# Altium PCB Mother_Board.PcbDoc (part 1 of 2)
Units mil, origin at the board's own origin, x right, y up, seen from the top; angles counter-clockwise.
Board outline 4940 x 2025 mil, 2 copper layers (Top Layer, Bottom Layer), stack 71.6 mil thick; 136 components, 138 nets, 424 pads, 117 vias.
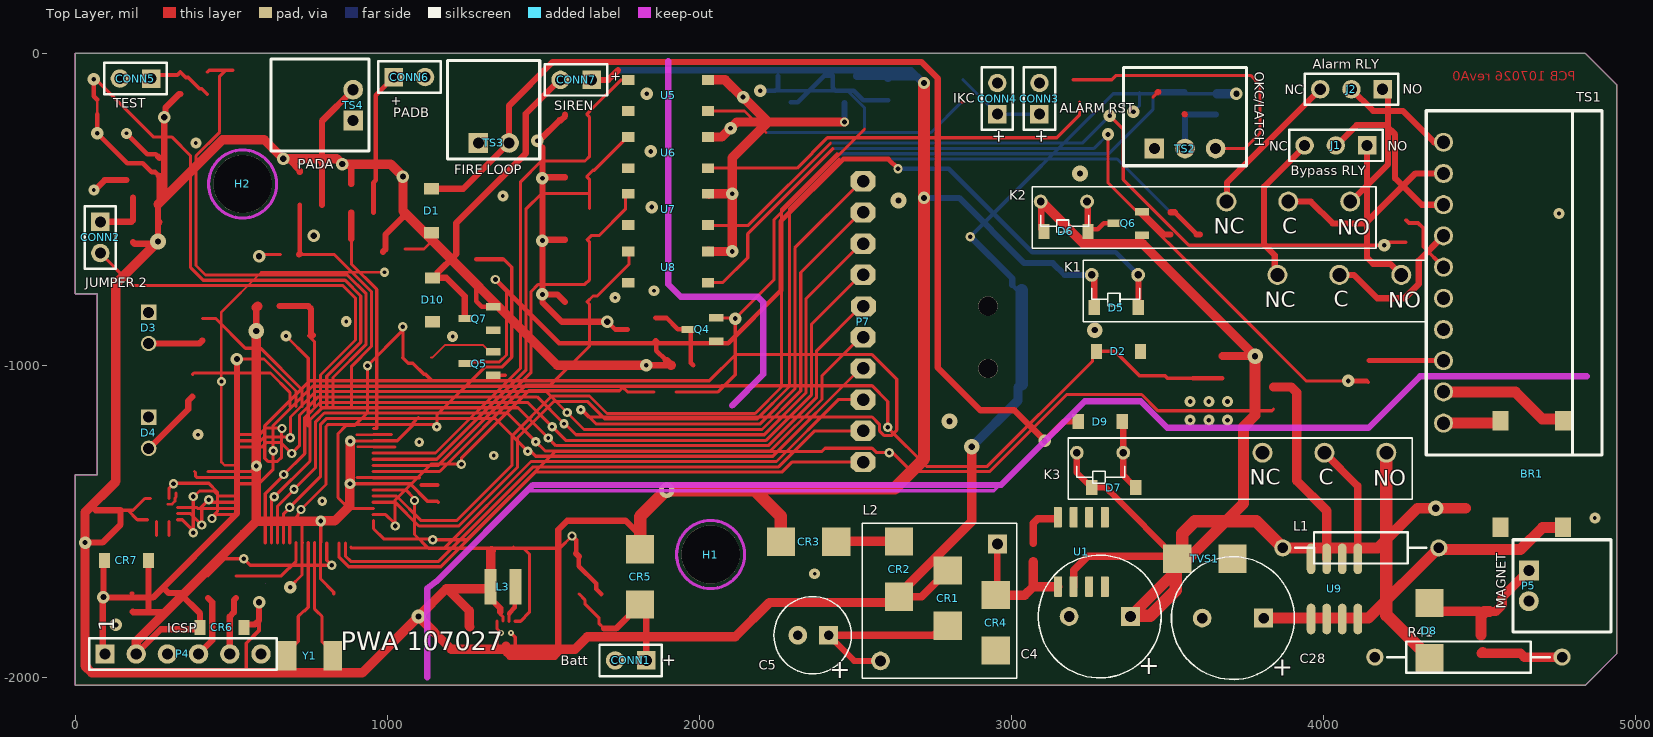
[diagram p0: Top Layer view]
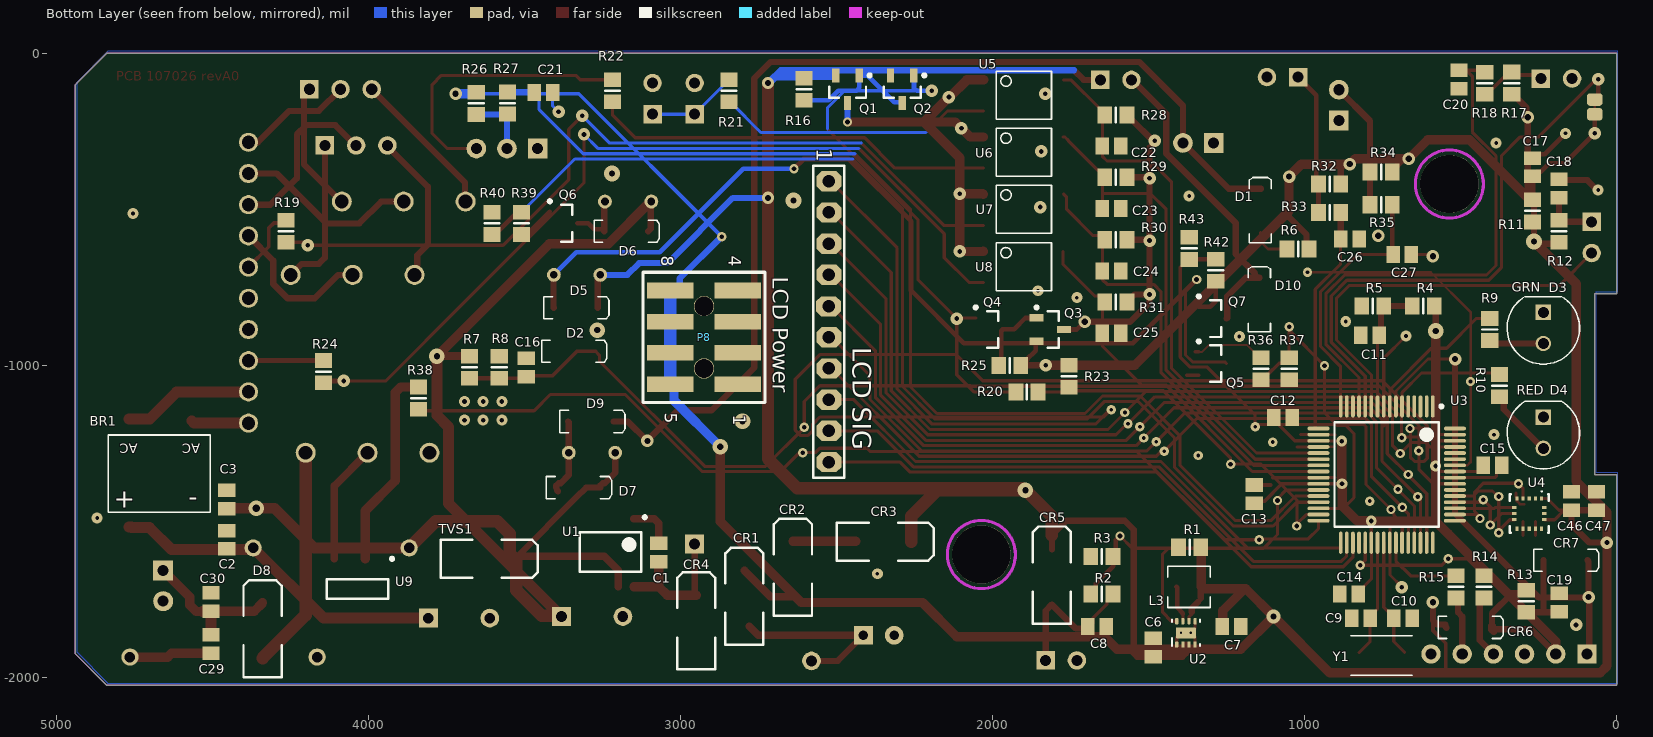
[diagram p1: Bottom Layer view, seen from below]

## Layer stack, top to bottom
Top Solder: solder mask 1, SM-001, Dk 4
Top Layer: signal copper 3.5
Dielectric 2: prepreg 2.8, PP-006, Dk 4.1
Dielectric 1: core 59, Core-043, Dk 4.3
Bottom Layer: signal copper 3.5
Dielectric 3: prepreg 2.8, PP-006, Dk 4.1
Bottom Solder: solder mask 1, SM-001, Dk 4

## Board outline
0,-2025 0,-1350 70,-1350 70,-770 0,-770 0,0 4840,0 4940,-100 4940,-1925 4840,-2025

## Design rules (kind name [scope] priority, off if disabled: settings)
AssemblyTestPointUsage [All] p1 off:
AssemblyTestpoint [All] p1 off: testpointundercomponent=TRUE minsize=40 maxsize=100 preferedsize=60 minholesize=0 maxholesize=40 preferedholesize=32 testpointgrid=1 usegrid=TRUE gridtolerance=0.01 allowsidetop=TRUE allowsidebottom=TRUE
BoardOutlineClearance [All] p1: gap=15 ignorepadtopadclearanceinfootprint=FALSE
Clearance [OnBottom vs OnBottom] p1: gap=7 ignorepadtopadclearanceinfootprint=FALSE
Clearance Clearance_1 [OnTop vs OnTop] p2: gap=7 ignorepadtopadclearanceinfootprint=FALSE
Clearance Clearance_2 [All] p3 off: gap=7 ignorepadtopadclearanceinfootprint=FALSE
Clearance Clearance_3 [All] p4: gap=7 ignorepadtopadclearanceinfootprint=FALSE
ComponentClearance [All] p1 off: gap=10 collisioncheckmode=3 verticalgap=10 showdistances=FALSE
DiffPairsRouting [All] p1 off: maxlimit=10 minlimit=10 mostfreqgap=10 toplayer_minwidth=15 toplayer_maxwidth=15 toplayer_prefwidth=15 bottomlayer_minwidth=15 bottomlayer_maxwidth=15 bottomlayer_prefwidth=15 maxuncoupledlength=500
FabricationTestPointUsage [All] p1 off: valid=0 allowmultiple=FALSE
FabricationTestpoint [All] p1 off: side=3 testpointundercomponent=TRUE minsize=40 maxsize=100 preferedsize=60 minholesize=0 maxholesize=40 preferedholesize=32 testpointgrid=1 allowsidetop=TRUE allowsidebottom=TRUE usegrid=TRUE gridtolerance=0.01
FanoutControl Fanout_Default [All] p1: bgadir=Out bgaviamode=Centered fanoutstyle=Auto fanoutdirection=Alternating viagrid=1 // Fanout_Default (Default Rule)
FanoutControl Fanout_Small [(CompPinCount < 5)] p2: bgadir=Out bgaviamode=Centered fanoutstyle=Auto fanoutdirection=OutThenIn viagrid=1 // Fanout_Small (Default Rule)
FanoutControl Fanout_LCC [IsLCC] p4: bgadir=Out bgaviamode=Centered fanoutstyle=Auto fanoutdirection=Alternating viagrid=1 // Fanout_LCC (Default Rule)
FanoutControl Fanout_BGA [IsBGA] p5: bgadir=Out bgaviamode=Centered fanoutstyle=Auto fanoutdirection=Alternating viagrid=1 // Fanout_BGA (Default Rule)
Height [All] p1 off: minheight=0 maxheight=2000 prefheight=500
HoleSize [All] p1: absolutevalues=TRUE maxlimit=200 minlimit=10 maxpercent=80.000 minpercent=20.000
HoleToHoleClearance [All] p1: gap=5 allowstackedmicrovias=TRUE
LayerPairs [All] p1: enforce=FALSE
MinimumAnnularRing [All] p1: minimumring=6
MinimumSolderMaskSliver [All] p1: minsoldermaskwidth=1
NetsToIgnore [InNet('GND')] p1:
PlaneConnect [All] p1: planeconnectstyle=Relief reliefexpansion=20 reliefentries=4 reliefconductorwidth=8 reliefairgap=12
PolygonConnect [All] p1: thpad.connectstyle=Relief thpad.reliefconductorwidth=15 thpad.reliefentries=4 thpad.polygonreliefangle="45 Angle" thpad.airgapwidth=12 smdpad.connectstyle=Relief smdpad.reliefconductorwidth=15 smdpad.reliefentries=4 smdpad.polygonreliefangle="45 Angle" smdpad.airgapwidth=12 via.connectstyle=Direct via.reliefconductorwidth=20 via.reliefentries=4 via.polygonreliefangle="45 Angle" via.airgapwidth=10
RoutingVias [All] p1: holewidth=10 width=20 viastyle="Through Hole" minholewidth=5 minwidth=10 maxholewidth=20 maxwidth=50
ShortCircuit [All] p1 off: allowed=FALSE
SilkToSilkClearance [All] p1 off: silktosilkclearance=1
SilkToSolderMaskClearance [IsPad] p1 off: minsilkscreentomaskgap=1 clearancetoexposedcopper=TRUE
SolderMaskExpansion [All] p1: expansion=4 istentingtop=FALSE
UnRoutedNet [All] p1: checkbadconnections=TRUE
Width [All] p1: maxlimit=100 minlimit=6 preferedwidth=12
10 further rules are at their usual default settings.

## Classes and differential pairs
component class U_MotherBoard: H1 H2 J1 J2 TS1 TS2 TS3 TS4
component class U_Group4_Inputs: 27002 C20 C21 C22 C23 C24 C25 C26 C27 CONN3 CONN4 CONN5 CONN6 Q2 Q3 Q4 R16 R18 R19 R20 R21 R22 R23 R24 R25 R26 R27 R28 R29 R30 R31 R32 R33 R34 R35 U5 U6 U7 U8
component class U_microcontroller: C9 C10 C11 C12 C13 C14 C15 C16 D1 D2 D3 D4 R4 R5 R6 R7 R8 R9 R10 Y1
component class U_Offboard_Outputs: C28 C29 C30 CONN7 D5 D6 D7 D8 D9 D10 K1 K2 K3 P5 Q5 Q6 Q7 R36 R37 R38 R39 R40 R41 R42 R43 U9
component class U_Power: BR1 C1 C2 C3 C4 C5 C6 C7 C8 CONN1 CR1 CR2 CR3 CR4 CR5 L1 L2 L3 R1 R2 R3 TVS1 U1 U2
component class U_Program_Selection: C17 C18 C19 C46 C47 CONN2 CR6 CR7 P4 R11 R12 R13 R14 R15 U4

## Components (designator, comment, footprint, x,y, rotation, side; value= is the part's Value field where it differs from the comment)
BR1 "DF02S" DF02S 4667.44,-1348 r0 top
C1 "Cap" C0805 3070,-1600 r90 bottom locked value=10pF
C2 "Cap" C0805 4455,-1558.98 r90 bottom value=0.01uF
C3 "Cap" C0805 4455,-1430 r90 bottom locked value=0.01uF
C4 "Cap Pol3" "10X12.5 CAP" 3283.43,-1805 r180 top locked value=220uF
C5 "Cap Pol3" "6.3X15 CAP" 2365,-1865 r180 top locked value=82uF
C6 "Cap" C0805 1485,-1904.94 r90 bottom value=10uF
C7 "Cap" C0805 1235,-1837.4 r180 bottom locked value=22nF
C8 "Cap" C0805 1665,-1837.4 r180 bottom locked value=0.1uF
C9 "Cap" C0805 820,-1810.43 r180 bottom locked value=22pF
C10 "Cap" C0805 685,-1810.43 r180 bottom locked value=22pF
C11 "Cap" C0805 790.2,-903.71 r180 bottom locked value=0.1uF
C12 "Cap" C0805 1070,-1167 r180 bottom locked value=0.1uF
C13 "Cap" C0805 1161.69,-1412.99 r90 bottom value=0.1uF
C14 "Cap" C0805 857.76,-1732.87 r180 bottom value=0.1uF
C15 "Cap" C0805 397.43,-1320.29 r180 bottom value=0.1uF
C16 "Cap" C0805 3495.12,-1006.58 r90 bottom value=0.1uF
C17 "Cap" C0805 270,-365 r90 bottom locked value=0.1uF
C18 "Cap" C0805 185,-433.31 r90 bottom value=0.1uF
C19 "Cap" C0805 183.79,-1759.89 r90 bottom value=0.1uF
C20 "Cap" C0805 505.36,-83.88 r270 bottom value=0.1uF
C21 "Cap" C0805 3440,-125 r180 bottom value=0.1uF
C22 "Cap" C0805 1618.78,-297.14 r180 bottom locked value=0.1uF
C23 "Cap" C0805 1618.78,-497.14 r180 bottom locked value=0.1uF
C24 "Cap" C0805 1618.78,-697.14 r180 bottom value=0.1uF
C25 "Cap" C0805 1618.78,-897.14 r180 bottom locked value=0.1uF
C26 "Cap" C0805 855,-595.2 r180 bottom locked value=0.1uF
C27 "Cap" C0805 687.2,-645 r180 bottom locked value=0.1uF
C28 "Cap Pol3" "10X12.5 CAP" 3710,-1810 r180 top locked value=100uF
C29 "Cap" C0805 4505.31,-1893.31 r270 bottom value=200uF
C30 "Cap" C0805 4505.31,-1758.72 r90 bottom value=0.01uF
C46 "Cap" C0805 145,-1435 r90 bottom locked value=10uF
C47 "Cap" C0805 65,-1435 r90 bottom locked value=100nF
CONN1 "Batt" BAT-2 1780,-1945.79 r180 top locked
CONN2 "JUMPER 2" HDR1X2 80,-540 r270 top locked
CONN3 "ALARM RST" BAT-2 3090,-145 r90 top locked
CONN4 "IKC" BAT-2 2955,-145 r90 top locked
CONN5 "TEST" HDR1X2 242.59,-80.73 r180 top
CONN6 "PADB" BAT-2 1070.83,-76.01 r0 top
CONN7 "SIREN" BAT-2 1605,-85 r180 top
CR1 "Diode" SMB 2795.79,-1746.3 r90 top locked
CR2 "Diode" SMB 2640,-1652.87 r90 top locked
CR3 "Diode" SMB 2350,-1565 r180 top locked
CR4 "D Schottky" SMB 2950,-1825 r90 top locked
CR5 "Diode" SMB 1810,-1677.87 r90 top locked
CR6 "Diode" SOD-123 470,-1840 r180 top locked
CR7 "Diode" SOD-123 163.9,-1624.88 r180 top
D1 "Diode" SOD-123 1141.9,-504.57 r90 top locked
D2 "D Zener" SOD-123 3343.22,-955.04 r180 top
D3 "GREEN" "T-1 3/4" 235,-880 r90 top locked
D4 "RED" "T-1 3/4" 235,-1216 r90 top locked
D5 "Diode" SOD-123 3336.36,-815 r180 top
D6 "Diode" SOD-123 3175,-570.43 r180 top locked
D7 "Diode" SOD-123 3328.19,-1391.57 r180 top locked
D8 "Diode" SMB 4340,-1850 r90 top locked
D9 "Diode" SOD-123 3285,-1180 r180 top locked
D10 "Diode" SOD-123 1144.84,-790 r90 top locked
H1 "Siren Mounting Hole" "SIREN MOUNT HOLE"#1 2036,-1687.5 r0 top locked
H2 "Siren Mounting Hole" "SIREN MOUNT HOLE"#2 5335,-1860 r0 top locked
J1 "Bypass RLY" "3 PIN HEADER FOR RELAY" 4040,-295 r0 top locked
J2 "Alarm RLY" "3 PIN HEADER FOR RELAY" 4090,-115 r0 top locked
K1 "Relay-SPDT" FTR-LY 3753.62,-710 r0 top locked
K2 "Relay-SPDT" FTR-LY 3590,-475 r0 top locked
K3 "Relay-SPDT" FTR-LY 3705.79,-1280 r0 top locked
L1 "Inductor" AXIAL-0.5 4120,-1585 r180 top locked value=100uH
L2 "Inductor" PE-53819NL 2768,-1760 r0 top locked value=173uH
L3 "Inductor" VLF3012S 1370.63,-1710 r0 top value=2.2uH
P4 "ICSP" HDR1X6 95,-1925 r0 top locked
P5 "MAGNET" 7025#1 4658.55,-1706.65 r270 top
P7 "LCD SIG" "10 PIN HEADER" 2525,-860 r180 top locked
P8 "LCD Power" "MOLEX 15453508" 2925,-910 r270 bottom
Q1 "MOSFET-P" SOT-23_N#1 2465,-115 r270 bottom
Q2 "2N7002" SOT-23_N#1 2290,-115 r270 bottom locked
Q3 "MOSFET-P" SOT-23_N#1 1815,-885 r180 bottom
Q4 "MOSFET-N" SOT-23_N#2 2010,-885 r180 top locked
Q5 "MOSFET-N" SOT-23_N#2 1295,-994.13 r180 top
Q6 "MOSFET-N" SOT-23_N#2 3375,-545 r180 top locked
Q7 "2N7002" SOT-23_N#2 1295,-850 r180 top locked
R1 "Res3" 6-0805_N 1368.66,-1582.72 r180 bottom value=100K
R2 "Res3" 6-0805_N 1650,-1732.87 r180 bottom value=200K
R3 "Res3" 6-0805_N 1650,-1612.87 r180 bottom value=110K
R4 "Res3" 6-0805_N 620,-810 r180 bottom value=100K
R5 "Res3" 6-0805_N 781.78,-810 r180 bottom value=330K
R6 "Res3" 6-0805_N 1021.17,-627 r180 bottom value=100K
R7 "Res3" 6-0805_N 3676.3,-1005.9 r90 bottom value=240K
R8 "Res3" 6-0805_N 3581.57,-1005.9 r270 bottom value=43K
R9 "Res3" 6-0805_N 407,-885 r90 bottom value=68R
R10 "Res3" 6-0805_N 375,-1065 r90 bottom value=68R
R11 "Res3" 6-0805_N 270,-505 r90 bottom value=100K
R12 "Res3" 6-0805_N 185,-570 r90 bottom value=100K
R13 "Res3" 6-0805_N 290,-1756.09 r90 bottom value=10K
R14 "Res3" 6-0805_N 425,-1710 r90 bottom value=100R
R15 "Res3" 6-0805_N 515,-1710 r90 bottom value=100R
R16 "Res3" 6-0805_N 2605,-115 r90 bottom value=10K
R17 "Res3" 6-0805_N 336.13,-95.22 r270 bottom value=10K
R18 "Res3" 6-0805_N 422.86,-95.69 r90 bottom value=100K
R19 "Res3" 6-0805_N 4265,-570 r90 bottom value=2.2K
R20 "Res3" 6-0805_N 1890,-1085 r180 bottom value=100
R21 "Res3" 6-0805_N 2845,-120 r90 bottom value=2.2K
R22 "Res3" 6-0805_N 3218,-120 r90 bottom value=2.2K
R23 "Res3" 6-0805_N 1755,-1035 r90 bottom value=100k
R24 "Res3" 6-0805_N 4145,-1020 r90 bottom value=2.2K
R25 "Res3" 6-0805_N 1945,-1000 r180 bottom value=10K
R26 "Res3" 6-0805_N 3655,-160.43 r90 bottom value=10K
R27 "Res3" 6-0805_N 3555,-159.29 r90 bottom value=100K
R28 "Res3" 6-0805_N 1605,-197.14 r180 bottom value=10K
R29 "Res3" 6-0805_N 1605,-397.14 r180 bottom value=10K
R30 "Res3" 6-0805_N 1605,-597.14 r180 bottom value=10K
R31 "Res3" 6-0805_N 1605,-797.14 r180 bottom value=10K
R32 "Res3" 6-0805_N 920,-418.33 r180 bottom value=10K
R33 "Res3" 6-0805_N 920,-510 r180 bottom value=100K
R34 "Res3" 6-0805_N 755,-380 r180 bottom value=10K
R35 "Res3" 6-0805_N 755,-485 r180 bottom value=100K
R36 "Res3" 6-0805_N 1140,-1010.79 r270 bottom value=100
R37 "Res3" 6-0805_N 1049.53,-1010.79 r270 bottom value=100k
R38 "Res3" 6-0805_N 3840,-1105 r90 bottom value=100k
R39 "Res3" 6-0805_N 3510.04,-545 r90 bottom value=100
R40 "Res3" 6-0805_N 3605,-545 r90 bottom value=100k
R41 "Res3" AXIAL-0.6 4465,-1935 r0 top locked value=10R
R42 "Res3" 6-0805_N 1285,-695 r90 bottom value=100
R43 "Res3" 6-0805_N 1370,-625 r90 bottom value=100k
TS1 "Molex 70553-0044" "10 Pin Molex Horizontal" 4385,-1185 r270 top locked
TS2 "OKC/LATCH" 7035 3556.57,-305 r0 top locked
TS3 "FIRE LOOP" 7025#2 1340.79,-287.09 r0 top
TS4 "PADA" 7025#2 890.54,-165.85 r90 top
TVS1 "D Zener" SMB 3620,-1620 r180 top locked
U1 "LM2674M-12" D0008A_M 3224.4,-1598 r270 top locked
U2 "TPS62172DSGT" DSG0008A_V 1380,-1860 r0 top locked
U3 "PIC18F67J10T-I/PT" PIC18F67J10T-I/PT 737,-1350 r0 top locked
U4 "LIS3DHTR" LIS3DHTR 280,-1475 r0 top locked
U5 "Optoisolator1" VOM618A-3T 1900,-135 r180 top locked
U6 "Optoisolator1" VOM618A-3T 1900,-318 r180 top locked
U7 "Optoisolator1" VOM618A-3T 1900,-500 r180 top locked
U8 "Optoisolator1" VOM618A-3T 1900,-685 r180 top locked
U9 "AUIPS7091GTR" SO8_M 4035.45,-1716.5 r270 top locked
Y1 "8MHz" ABM3 752,-1930 r180 top locked

## Footprints (in the part's own frame and the unit in brackets; to place one, negate y for a bottom-side part, rotate by r counter-clockwise, add the part's x,y. Pads: shape width x height; smd on the part's side, far side on the other; paste and mask are expansions set on the pad)
"3 PIN HEADER FOR RELAY" [mm]
  rect 1.5x1.5 hole 0.9: 1(2.54,0)
  round 1.5 hole 0.9: 2(0,0) 3(-2.54,0)
  silkscreen extent -3.81,-1.27 3.81,1.27, body extent -3.78,-1.29 3.84,1.25, height 8.72
6-0805_N [mm] "Chip Resistor, Body 2.0x1.2mm, IPC Medium Density"
  rect 1.2x1.4 smd: 1(-0.9,0) 2(0.9,0)
  silkscreen extent 0,-0.6 0,0.6, body extent -1.07,-0.7 1.07,0.7, height 0.7
"6.3X15 CAP" [mil] "6.3x15 Cap"
  rect 60x60 hole 30: 1(-49.21,0)
  round 60 hole 30: 2(49.21,0)
  silkscreen extent -122,-124 126,124, body extent -122,-124 126,124, height 591
"10 PIN HEADER" [mil] "10 pin header, vertical"
  oct 80x65 hole 40: 1(0,-450) 2(0,-350) 3(0,-250) 4(0,-150) 5(-1,-49) 6(0,50) 7(0,150) 8(0,250) 9(0,350) 10(0,450)
  body extent -50,-502 49,507, height 124
"10 Pin Molex Horizontal" [mm] "Horizontal Molex SL 10 Pin Connector"
  round 1.55 hole 1.09: 1(0,0) 2(-2.54,0) 3(-5.08,0) 4(-7.62,0) 5(-10.16,0) 6(-12.7,0) 7(-15.24,0) 8(-17.78,0) 9(-20.32,0) 10(-22.86,0)
  silkscreen extent -25.43,-1.4 2.6,12.9, body extent -25.47,-0.7 2.47,12.89, height 7.06
"10X12.5 CAP" [mil] "10x12.5 CAP"
  rect 60x60 hole 34: 1(-98.43,0)
  round 60 hole 34: 2(98.43,0)
  silkscreen extent -197,-197 197,197, body extent -197,-197 197,197, height 492
7025#1 [mil] "MOLEX SPOX 2-terminal right angle through hole header"
  rect 64x64 hole 35.43: 1(-49.21,0)
  round 64 hole 35.43: 2(49.21,0)
  silkscreen extent -148,-51 148,264, body extent -146,-49 146,262, height 195
7025#2 [mil] "MOLEX SPOX 2-terminal right angle through hole header"
  rect 62.99x62.99 hole 35.43: 1(-49.21,0)
  round 62.99 hole 35.43: 2(49.21,0)
  silkscreen extent -148,-51 148,264, body extent -146,-49 146,262, height 195
7035 [mm] "MOLEX SPOX 3-terminal right angle through hole header"
  rect 1.6x1.6 hole 0.9: 1(-2.5,0)
  round 1.6 hole 0.9: 2(0,0) 3(2.5,0)
  silkscreen extent -5,-1.4 5,6.6, body extent -4.95,-1.35 4.95,6.55, height 4.95
ABM3 [mm] "8MHz Crystal SMD"
  rect 1.5x2.4 smd: 1(-1.85,0) 2(1.85,0)
AXIAL-0.5 [mm] "Axial Device, Thru-Hole; 2 Leads; 0.5 in Pin Spacing"
  round 1.4 hole 0.85: 1(-6.35,0) 2(6.35,0)
  silkscreen extent -5.33,-1.27 5.33,1.27
AXIAL-0.6 [mm] "Axial Device, Thru-Hole; 2 Leads; 0.6 in Pin Spacing"
  round 1.4 hole 0.85: 1(-7.62,0) 2(7.62,0)
  silkscreen extent -6.6,-1.27 6.6,1.27
BAT-2 [mm] "Battery; 2 Leads"
  rect 1.5x1.5 hole 0.9: 1(-1.27,0)
  round 1.5 hole 0.9: 2(1.27,0)
  silkscreen extent -2.54,-1.27 2.54,1.27
C0805 [mm] "Chip Capacitor, Body 2.0x1.3mm, IPC High Density"
  rect 1.1x1.4 smd: 1(-0.75,0) 2(0.75,0)
  body extent -1.1,-0.72 1.1,0.72, height 1.4
D0008A_M [mm] "SOIC, 8-Leads, Body 5x4mm, Pitch 1.27mm, IPC Low Density"
  rrect15% 1.65x0.65 smd: 1(-2.825,-1.905) 2(-2.825,-0.635) 3(-2.825,0.635) 4(-2.825,1.905) 5(2.825,1.905) 6(2.825,0.635) 7(2.825,-0.635) 8(2.825,-1.905)
  body extent -3,-2.45 3,2.45, height 1.63
DF02S [mm] "Single Phase Bridge Rectifier"
  rect 1.3x1.6 smd: 1(-2.55,4.33) 2(2.55,4.33) 3(2.55,-4.33) 4(-2.55,-4.33)
  body extent -4.11,-3.19 4.31,3.23, height 3.8
DSG0008A_V [mm]
  rrect40% 0.25x0.5 smd far side: 1(0.762,-0.884) 2(0.262,-0.884) 3(-0.238,-0.884) 4(-0.738,-0.884) 5(-0.738,1.016) 6(-0.238,1.016) 7(0.262,1.016) 8(0.762,1.016)
  rrect11% 1.6x0.9 smd far side paste-0.45: 9(0.012,0.066)
  body extent -1.04,-0.98 1.06,1.12, height 0.8
FTR-LY [mm] "SPDT RELAY 6A SLIM TYPE"
  round 1.627 hole 1.127: 1(7.56,0) 2(2.52,0) 3(12.6,0)
  round 1.127 hole 0.627: 4(-12.6,0) 5(-8.82,0)
  silkscreen extent -13.3,-3.8 14.7,1.2, body extent -13.3,-3.8 14.7,1.2, height 14.5
HDR1X2 [mm] "Connector; Header; 2 Position"
  rect 1.5x1.5 hole 0.9: 1(0,0)
  round 1.5 hole 0.9: 2(2.54,0)
  silkscreen extent -1.27,-1.27 3.81,1.27
HDR1X6 [mil] "Connector; Header; 6 Position"
  rect 62x62 hole 36: 1(0,0)
  round 62 hole 36: 2(100,0) 3(200,0) 4(300,0) 5(400,0) 6(500,0)
  silkscreen extent -50,-50 550,50
LIS3DHTR [mm]
  rect 0.25x0.35 smd far side: 1(-1,1.225) 2(-0.5,1.225) 3(0,1.225) 4(0.5,1.225) 5(1,1.225) 9(1,-1.225) 10(0.5,-1.225) 11(0,-1.225) 12(-0.5,-1.225) 13(-1,-1.225)
  rect 0.35x0.25 smd far side: 6(1.225,0.5) 7(1.225,0) 8(1.225,-0.5) 14(-1.225,-0.5) 15(-1.225,0) 16(-1.225,0.5)
  body extent -1.5,-1.5 1.5,1.5, height 1
"MOLEX 15453508" [mil] "2.54mm Pitch C-Grid PCB Connector, Surface Mount, High Profile, Dual Row, Vertical, 8 Circuits"
  round 65 / inner round 65 / far side round 62 hole 62 unplated: 0(-100,0) 0(100,0)
  rect 50x150 smd: 1(150,108) 2(50,108) 3(-50,108) 4(-150,108) 5(150,-108) 6(50,-108) 7(-50,-108) 8(-150,-108)
  silkscreen extent -208,-196 209,195, body extent -199,-139 200,127, height 100
PE-53819NL [mm] "INDUCTOR for 12V Regulator"
  rect 1.52x1.52 hole 0.89: 1(4.76,4.76)
  round 1.52 hole 0.89: 2(-4.76,-4.76)
  silkscreen extent -6.26,-6.16 6.34,6.44, body extent -6.26,-6.16 6.34,6.44, height 9.52
PIC18F67J10T-I/PT [mm]
  oval 0.3x1.8 smd far side: 1(-3.75,5.55) 2(-3.25,5.55) 3(-2.75,5.55) 4(-2.25,5.55) 5(-1.75,5.55) 6(-1.25,5.55) 7(-0.75,5.55) 8(-0.25,5.55) 9(0.25,5.55) 10(0.75,5.55) 11(1.25,5.55) 12(1.75,5.55) 13(2.25,5.55) 14(2.75,5.55) 15(3.25,5.55) 16(3.75,5.55) 33(3.75,-5.55) 34(3.25,-5.55) 35(2.75,-5.55) 36(2.25,-5.55) 37(1.75,-5.55) 38(1.25,-5.55) 39(0.75,-5.55) 40(0.25,-5.55) 41(-0.25,-5.55) 42(-0.75,-5.55) 43(-1.25,-5.55) 44(-1.75,-5.55) 45(-2.25,-5.55) 46(-2.75,-5.55) 47(-3.25,-5.55) 48(-3.75,-5.55)
  oval 1.8x0.3 smd far side: 17(5.55,3.75) 18(5.55,3.25) 19(5.55,2.75) 20(5.55,2.25) 21(5.55,1.75) 22(5.55,1.25) 23(5.55,0.75) 24(5.55,0.25) 25(5.55,-0.25) 26(5.55,-0.75) 27(5.55,-1.25) 28(5.55,-1.75) 29(5.55,-2.25) 30(5.55,-2.75) 31(5.55,-3.25) 32(5.55,-3.75) 49(-5.55,-3.75) 50(-5.55,-3.25) 51(-5.55,-2.75) 52(-5.55,-2.25) 53(-5.55,-1.75) 54(-5.55,-1.25) 55(-5.55,-0.75) 56(-5.55,-0.25) 57(-5.55,0.25) 58(-5.55,0.75) 59(-5.55,1.25) 60(-5.55,1.75) 61(-5.55,2.25) 62(-5.55,2.75) 63(-5.55,3.25) 64(-5.55,3.75)
  body extent -5,-5 5,5, height 1.6
"SIREN MOUNT HOLE"#1 [mil]
  round 187 hole 187 unplated: 0(0,81.2)
"SIREN MOUNT HOLE"#2 [mil]
  round 187 hole 187 unplated: 0(-4799,1441.3)
SMB [mm] "DO-214-AA/SMB; 2 C-Bend Leads; Body 5.3 x 3.6 mm, inc. leads (LxW)"
  rect 2.3x2.3 smd: 1(-2.25,0) 2(2.25,0)
SO8_M [mm] "SOIC, 8-Leads, Body 4.9x3.9mm, Pitch 1.27mm, IPC Low Density"
  oval 2.5x0.7 smd: 1(-2.45,-1.905) 2(-2.45,-0.635) 3(-2.45,0.635) 4(-2.45,1.905) 5(2.45,1.905) 6(2.45,0.635) 7(2.45,-0.635) 8(2.45,-1.905)
  body extent -2,-2.5 2,2.5, height 1.75
SOD-123 [mm] "SOD-123 Diode"
  rect 0.91x1.22 smd: 1(-1.79,0) 2(1.79,0)
  body extent -1.79,-1.9 1.41,0.85, height 2.45
SOT-23_N#1 [mm] "SOT23, 3-Leads, Body 2.9x1.3mm, Pitch 0.95mm, Lead Span 2.5mm, IPC Medium Density"
  rect 1.15x0.6 smd: 1(-1.125,0.95) 2(-1.125,-0.95) 3(1.125,0)
  silkscreen extent -1.25,-1.5 0.7,1.92, body extent -0.7,-1.5 0.7,1.5, height 1.1
SOT-23_N#2 [mm] "SOT23, 3-Leads, Body 2.9x1.3mm, Pitch 0.95mm, Lead Span 2.5mm, IPC Medium Density"
  rect 1.15x0.6 smd: 1(-1.125,-0.95) 2(-1.125,0.95) 3(1.125,0)
  body extent -0.7,-1.5 0.7,1.5, height 1.1
"T-1 3/4" [mil] "T-1 3/4 LED"
  round 49.37 hole 35: 1(-50,0)
  rect 49.37x49.37 hole 35: 2(50,0)
  body extent -101,-98 96,98, height 1039
VLF3012S [mm] "INDUCTOR FOR 3.3V Regulator"
  rect 1x2.9 smd: 1(1.015,0) 2(-1.015,0)
  body extent -1.85,-1.4 1.45,1.7, height 2.45
VOM618A-3T [mm] "Single Opto-Isolator"
  rect 1x0.8 smd: 1(-3.25,-1.27) 2(-3.25,1.27) 3(3.25,1.27) 4(3.25,-1.27)
  body extent -2.25,-1.97 2.25,1.93, height 3.8

## Part data
BR1: "Single Phase Bridge Rectifier", ComponentLink1Description=Datasheet
C1 C2 C3 C6 C7 C8 C9 C10 C11 C12 C13 C14 C15 C16 C17 C18 C19 C20 C21 C22 C23 C24 C25 C26 C27 C29 C30 C46 C47: "Capacitor", PackageReference=RAD-0.3
C4: "Polarized Capacitor (Surface Mount)", PACKAGE="10x12.5 50V radial capacitor", ComponentLink1Description=Datasheet, ComponentLink1URL=http://products.nichicon.co.jp/en/pdf/XJA043/e-uvz.pdf
C5: "Polarized Capacitor (Surface Mount)", PACKAGE="6.3x15 35V radial capacitor", ComponentLink1Description=Datasheet, ComponentLink1URL=http://www.farnell.com/datasheets/1901197.pdf
C28: "Polarized Capacitor (Surface Mount)", MFR=KEMET, MFR P/N=ESK107M050AH1AA, PACKAGE="10x12.5mm Electrolytic Capacitor"
CONN1 CONN2 CONN3 CONN4 CONN5 CONN6 CONN7 P5: library part "Header 2", "Header, 2-Pin", ComponentLink1Description=Datasheet
CR1 CR2 CR3 CR5: "Default Diode", MFR P/N=4004TR, PACKAGE=SMB, ComponentLink1Description=Datasheet
CR4: "Schottky Diode", MFR=VIshay, MFR P/N=SS26, PACKAGE="SMB Schottky Barrier Rectifier", ComponentLink1Description=Datasheet, ComponentLink1URL=http://www.vishay.com/docs/88748/ss22.pdf
CR6 CR7: "Default Diode", MFR P/N=4004TR, ComponentLink1Description=Datasheet
D1 D5 D6 D7 D9: "1N4937", MFR P/N=1N4148W, ComponentLink1Description=Datasheet
D2: "Zener Diode", MFR="ON Semiconductor", MFR P/N=MMSZ5221BT1, PACKAGE=SOD-123, ComponentLink1Description=Datasheet
D3: library part LED2, "Typical RED, GREEN, YELLOW, AMBER GaAs LED", MFR=Kingbright, MFR P/N=W53LCGCK, PACKAGE="T-1 3/4 LED Green Low I", ComponentLink1Description=Datasheet
D4: library part LED2, "Typical RED, GREEN, YELLOW, AMBER GaAs LED", MFR=Kingbright, MFR P/N=W53L8RC, PACKAGE="T-1 3/4 LED Red Low I", ComponentLink1Description=Datasheet
D8: "1N4937", MFR P/N=4004TR, ComponentLink1Description=Datasheet
D10: "1N4937", MFR P/N=1N4148W, PACKAGE=SMB, ComponentLink1Description=Datasheet
J1 J2: library part "Header 3", "Header, 3-Pin"
K1 K2 K3: "Single-Pole Dual-Throw Relay", ComponentLink1Description=Datasheet
L1: MFR=Fastron, MFR P/N=SMCC/N-101J-01, PACKAGE="Leaded Inductor", ComponentLink1Description=Datasheet, ComponentLink1URL=http://www.fastrongroup.com/image-show/72/SMCC.pdf?type=Complete-DataSheet&productType=series
L2: MFR=Pulse, MFR P/N=PE-53819, PACKAGE="Toroid Inductor THT", ComponentLink1Description=Datasheet, ComponentLink1URL=http://products.pulseelex.com/files/product_files/SPM2007_47.pdf
P4: library part "Header 6", "Header, 6-Pin"
P7: library part "Header 10", "Header, 10-Pin"
P8: library part 0015453508, "Header Connector,PCB Mount,PLUG,8 Contacts,SKT,0.1 Pitch"
Q1 Q3: "P-Channel MOSFET", MFR P/N=NDS0605, ComponentLink1Description=Datasheet
Q2 Q7: library part MOSFET-N, "N-Channel MOSFET", ComponentLink1Description=Datasheet, MFR P/N=2N7002
Q4 Q5 Q6: "N-Channel MOSFET", MFR P/N=2N7002, ComponentLink1Description=Datasheet
R1 R2 R3 R4 R5 R6 R7 R8 R9 R10 R11 R12 R13 R14 R15 R16 R17 R18 R19 R20 R21 R22 R23 R24 R25 R26 R27 R28 R29 R30 R31 R32 R33 R34 R35 R36 R37 R38 R39 R40 R41 R42 R43: "Resistor", PACKAGE="0805 SMD 1/8W", ComponentLink1Description=Datasheet
TS1: "Molex SL Horizontal 1 x 10 SL Header"
TS2: library part "Header 3H", "Header, 3-Pin, Right Angle"
TS3 TS4: library part "Header 2H", "Header, 2-Pin, Right Angle"
TVS1: "Zener Diode", MFR=Fairchild, MFR P/N=SMBJ30CA, PACKAGE="SMB Transient Voltage Supressor", ComponentLink1Description=Datasheet, ComponentLink1URL=https://www.fairchildsemi.com/datasheets/SM/SMBJ30CA.pdf
U1: library part CMP-019-00049-1, "IC REG BUCK 12V 0.5A 8-SOIC", ComponentLink1Description="Datasheet URL", ComponentLink1URL=http://www.ti.com/general/docs/lit/getliterature.tsp?genericPartNumber=LM2674&fileType=pdf
U2: library part TI-TPS62172DSG8-1600X900TP, "Buck Step Down Regulator with 3 to 17 V Input and 3.3 V Output, -40 to 85 degC, 8-Pin WSON (DSG), Green (RoHS & no Sb/Br)", MFR=Instruments, MFR P/N=TPS62172, PACKAGE="3.3V Buck Converter", ComponentLink1Description=Datasheet, ComponentLink1URL=http://www.ti.com/general/docs/lit/getliterature.tsp?genericPartNumber=TPS62172&fileType=pdf
U3: library part CMP-0116-00693-1, "High Performance, 1-Mbit Flash Microcontroller with nanoWatt Technology, 128K Flash, 64-Pin TQFP, Industrial Temperature Range, Tape and Reel", MFR=Microchip, MFR P/N=PIC18F67J10, PACKAGE="64 pin Microcontroller", ComponentLink1Description=Datasheet
U4: library part STM-LIS3DH-LGA-16, "MEMS Digital Output Motion Sensor Ultra Low-Power High Performance 3-Axes \"nano\" Accelerometer, 1.71 to 3.6 V, -40 to 85 degC, 16-pin (LGA-16), Pb-Free, Tape and Reel", ComponentLink1Description="Manufacturer URL", ComponentLink1URL=http://www.st.com/, PackageReference=LGA-16
U5 U6 U7 U8: "4-Pin Phototransistor Optocoupler", PackageReference=DIP-4
U9: "High Side MOSFET Switcher", MFR="International Rectifier/Infineon", PACKAGE="8 Lead SOIC", ComponentLink1Description=Datasheet, ComponentLink1URL=http://www.infineon.com/dgdl/ips511g.pdf?fileId=5546d462533600a4015355c3ba2f161b, MFR P/N=AUIPS7091GTR
Y1: library part XTAL, "Crystal Oscillator 8MHz", MFR=Abracom, MFR P/N=ABM3, PACKAGE="SMD 8MHz Crystal Ocsillator", ComponentLink1Description=Datasheet, ComponentLink1URL=http://www.abracon.com/Resonators/abm3.pdf
L3: ComponentLink1Description=Datasheet

## Free pads (board coordinates)
  rrect50% 50x40 smd far side mask+4: 1(70.16,-195.06) 2(70.16,-148.06)

## Via types
v1: diameter 30, hole 15, Top Layer to Bottom Layer, tented both sides, 29 vias
v2: diameter 40, hole 15, Top Layer to Bottom Layer, tented both sides, 24 vias
v3: diameter 40, hole 20, Top Layer to Bottom Layer, tented both sides, 14 vias
v4: diameter 35, hole 12, Top Layer to Bottom Layer, tented both sides, 13 vias
v5: diameter 30, hole 12, Top Layer to Bottom Layer, tented both sides, 10 vias
v6: diameter 35, hole 15, Top Layer to Bottom Layer, tented both sides, 10 vias
v7: diameter 50, hole 20, Top Layer to Bottom Layer, tented both sides, 9 vias
v8: diameter 30, hole 12.01, Top Layer to Bottom Layer, tented both sides, 3 vias
v9: diameter 19.68, hole 7.87, Top Layer to Bottom Layer, tented top, 2 vias
v10: diameter 30, hole 15, Top Layer to Bottom Layer, 1 vias
v11: diameter 45, hole 20, Top Layer to Bottom Layer, tented both sides, 1 vias
v12: diameter 50, hole 25, Top Layer to Bottom Layer, tented both sides, 1 vias

## Nets (pads, with @x,y where several pads share a name; then routed paths per layer and width w, separated by ;. In a path a pad name is that pad's centre, name@x,y a point inside that pad or via, vN(x,y) a via of type N, cw(c..) or ccw(c..) an arc to the next point about the centre after c; other vN are vias at no path point)
3V3: C7.1 C46.1 C47.1 CR6.1 L3.2 P8.5 P8.6 P8.7 P8.8 Q3.2 R1.2 R6.2 R11.1 R12.1 R17.2 R25.2 R26.2 R32.2 R34.2 U2.6 U4.1 U4.14 | length 11542.4
  Top Layer w6: 1361.93,-1797.22 1361.93,-1790.75 ; 1370.5,-1819.87 1370.63,-1820
  Top Layer w10: 145,-1464.53 168.68,-1464.53 ; 231.77,-1494.68 198.84,-1494.68 168.68,-1464.53 ; 240.55,-1426.77 222.66,-1426.77 184.9,-1464.53 168.68,-1464.53 ; 1361.93,-1797.22 1370.5,-1805.79 1370.5,-1819.87
  Top Layer w12: 548.02,-1975.53 548.02,-1890.95 588.95,-1850.02 v3(588.95,-1759.53)
  Top Layer w15: L3.2@1330.67,-1710 1330.67,-1747.4 L3.2@1342.85,-1759.59 ; L3.2@1335.35,-1745.23 L3.2@1335.35,-1714.69 ; 1859.29,-922.4 1860.25,-922.4 ; 1862.06,-924.21 1862.06,-952.5 1892.01,-982.44
  Top Layer w20: v2(31.03,-1567.82) 87.18,-1567.82 145,-1510 145,-1464.53 65,-1464.53 ; 185,-605.43 189.57,-610 v7@265,-610 ; 270,-540.43 265,-545.43 v7@265,-610 ; 336.13,-130.65 332.19,-130.65 288.83,-174.02 288.83,-201.23 v3(285,-205.06) 285,-459.19 265,-479.19 v7@265,-610 ; CR6.1@545,-1840.87 548.39,-1837.49 548.39,-1830.6 575.42,-1830.6 588.95,-1817.07 v3(588.95,-1759.53) ; v3(666.68,-337.78) 670.51,-341.61 685.12,-341.61 719.57,-376.06 719.57,-380 ; v3(855.53,-355) 880,-355 884.57,-359.57 884.57,-418.33 ; 985.74,-635.64 993.77,-627.61 993.77,-581.42 1050,-525.2 v3(1050,-395) ; L3.2@1342.85,-1759.59 1361.93,-1778.66 1361.93,-1790.75 ; v2(1830,-999.57) 1909.13,-999.57 ; 1860.25,-922.4 1862.06,-924.21 ; 1892.01,-982.44 1895.94,-982.44 1909.57,-996.06 1909.57,-1000
  Top Layer w30: v7(265,-603) 130,-738 130,-1371.97 31.03,-1470.94 v2(31.03,-1567.82) 31.03,-1963.3 52.73,-1985 920,-1985 v11(1100,-1805) ; 265,-483.29 471.53,-276.76 605.65,-276.76 v3(666.68,-337.78) 838.31,-337.78 v3(855.53,-355) 1010,-355 v3(1050,-395) 1050,-505.17 1544.39,-999.57 v2(1830,-999.57) ; 1191.6,-1715.97 1262.35,-1786.72 1262.35,-1835.23 1264.53,-1837.4 ; 1333.7,-1593.19 1331.26,-1595.63 1331.26,-1709.41 L3.2@1330.67,-1710 1325.98,-1714.69 1325.98,-1715.97 1189.03,-1715.97 v11(1100,-1805) ; 1909.13,-999.57 1909.57,-1000 ; v7(2873,-1260.58) 2873,-1500.58 2613.58,-1760 2225,-1760 2115,-1870 1641.24,-1870 1601.24,-1910 1205,-1910 v11(1100,-1805)
  Bottom Layer w12: v1(2868.62,-587.32) 3326.72,-129.22 v3(3721.24,-129.22)
  Bottom Layer w15: v1(2868.62,-587.32) v1@2869.02,-587.32 ; P8.8@3002.99,-742.5 3020.49,-760 P8.8@3033,-760
  Bottom Layer w20: v1@2869.02,-587.32 3002.99,-721.29 P8.8@3002.99,-742.5
  Bottom Layer w30: v7(2873,-1260.58) 3021.15,-1112.43 3021.15,-1070 3031.15,-1060 P8.5@3033,-1060 ; R26.2@3659.22,-129.22 v3(3721.24,-129.22)
  Bottom Layer w40: P8.5@3033,-1060 P8.6@3033,-960 P8.7@3033,-860 P8.8@3033,-760
3V3D: Q3.3 R28.2 R29.2 R30.2 R31.2 | length 1189.6
  Top Layer w15: v3(1705,-860) 1730,-885 1770.71,-885
  Top Layer w20: 1569.57,-797.14 1545.03,-772.6 v2(1497.14,-772.6) ; 1569.57,-597.14 1500,-597.14 v2(1497.14,-600) ; 1569.57,-397.14 1500,-397.14 v2(1497.14,-400) ; 1569.57,-197.14 1569.57,-201.08 1555.94,-214.7 1552.01,-214.7 1490.53,-276.17 1484.51,-276.17 v2(1480.68,-280) 1480.68,-285.41 1497.14,-301.87 v2(1497.14,-400) ; v3(1705,-860) 1559.34,-860 1497.14,-797.8 v2(1497.14,-772.6) ; v2(1497.14,-772.6) v2(1497.14,-600) ; v2(1497.14,-600) v2(1497.14,-400)
3V3P: C12.1 C13.1 C14.2 C15.1 CR6.2 P4.2 R4.2 R13.2 U3.19 U3.26 U3.38 U3.57 | length 3215.9
  Top Layer w10: 424.53,-1340 424.69,-1340.16 518.5,-1340.16 562.58,-1340.16 v6(580.19,-1322.55) ; v6(786.5,-1499.11) 786.5,-1568.22 786.21,-1568.5 786.21,-1684.95 828.23,-1726.97 828.23,-1732.87 ; v6(880,-1379.53) 955.5,-1379.53 ; v6(881.06,-1242.79) 881.78,-1242.08 955.16,-1242.08 955.5,-1241.73 1032.02,-1241.73 1082.87,-1190.88 1082.87,-1183.65 1099.53,-1167
  Top Layer w12: 955.5,-1379.53 1073.11,-1379.53 1128.9,-1435.32 1159.78,-1435.32 1163.06,-1438.6
  Top Layer w20: P4.2@195,-1925 273.94,-1846.06 324.6,-1846.06 325.12,-1845.53 CR6.2@393.99,-1845.53 ; 290,-1720.65 299.31,-1729.96 334.3,-1729.96 399.5,-1795.15 CR6.2@399.53,-1840 ; v7(580,-890) 580,-814.57
  Top Layer w25: CR6.2@394.11,-1851.52 399.06,-1846.57 CR6.2@399.06,-1835
  Top Layer w30: P4.2@195,-1925 195,-1885 539.86,-1540.14 ; 540.06,-1540.14 580.19,-1500.01 v6(580.19,-1322.55) ; v7(580,-890) 579.83,-890.17 579.83,-1322.01 v6@580.28,-1322.46 ; 580,-814.57 584.57,-810 ; 580.19,-1499.11 v6(786.5,-1499.11) 787.46,-1498.15 790.99,-1498.15 791.05,-1498.09 831.82,-1498.09 880,-1449.91 v6(880,-1379.53) 880.53,-1379 880.53,-1243.32 v6(881.06,-1242.79)
9V: C6.1 CONN7.1 CR3.2 CR5.2 D5.2 K1.4 Q1.2 R16.2 U2.2 U2.3 | length 5747.6
  Top Layer w20: 1380.47,-1914.68 1380.47,-1922.73 1392.19,-1934.45 1490.93,-1934.45 ; 1485,-1934.47 1536.34,-1934.47 1548.06,-1922.75 1548.06,-1526.74 1576.74,-1498.05 1763.52,-1498.05 1810,-1544.53 CR5.2@1810,-1589.29 ; CONN7.1@1655,-85 1708.57,-85 1739.17,-54.4 ; K1.4@3257.56,-710 3257.56,-716.59 3265.89,-724.92 D5.2@3265.89,-815
  Top Layer w30: 1380.47,-1914.68 1380.47,-1900.78 ; v3@2717.29,-95 v3(2720,-95)
  Top Layer w40: CR5.2@1810,-1544.53 1810,-1485 v7(1895,-1400) ; CR3.2@2261.42,-1565 2260.1,-1563.68 2260.1,-1483.16 2176.94,-1400 v7(1895,-1400) ; v3(2720,-95) v3(2720,-463.48) 2720,-1300 2626.69,-1393.31 1904.4,-1393.31 1897.71,-1400 v7(1895,-1400)
  Bottom Layer w20: 1739.17,-54.4 2679.4,-54.4 v3(2720,-95) ; Q1.2@2502.4,-70.71 2502.4,-73.14 2504.21,-74.95 2600.39,-74.95 R16.2@2605,-79.57 ; v3(2720,-463.48) 2832.48,-463.48 3041.1,-672.09 3133,-672.09 3170.91,-710 K1.4@3257.56,-710
  Bottom Layer w25: R16.2@2605,-79.57 2609.61,-74.95 2697.25,-74.95 v3@2717.29,-95
9VC: Q1.3 U5.1 U6.1 U7.1 U8.1 | length 1376.8
  Top Layer w30: U5.1@2027.95,-85 2082.43,-85 2137.43,-140 v2(2140,-140) 2220,-220 ; U8.1@2030,-634.53 2030.47,-635 v2(2105,-635) v2(2105,-450) ; U7.1@2030,-451.19 2031.19,-450 v2(2105,-450) ; U6.1@2030,-267.86 2072.14,-267.86 v2(2100,-240) 2120,-220 2220,-220 ; v1(2465,-220) 2220,-220 ; v2(2105,-450) 2105,-335 2220,-220
  Bottom Layer w20: v1(2465,-220) Q1.3@2465,-159.29
24V: BR1.3 C2.1 C28.1 L1.1 U9.5 U9.6 U9.7 U9.8 | length 1387.4
  Top Layer w30: C28.1@3808.43,-1810 4009.23,-1810 4010.45,-1811.22 U9.7@4010.45,-1812.95 U9.5@4110.45,-1812.95
  Top Layer w35: C28.1@3810,-1810 4145,-1810 L1.1@4370,-1585 4373.85,-1588.85 4388.08,-1588.85 4389.7,-1590.47 4455,-1590.47 4632.09,-1590.47 4702.99,-1519.57 4759.75,-1519.57 4760.84,-1518.47 BR1.3@4767.84,-1518.47
24VC: C3.1 C4.1 D6.2 D7.2 K2.4 K3.4 L1.2 R7.2 TVS1.2 U1.7 | length 4372
  Top Layer w20: K2.4@3096.18,-475 3096.18,-562.13 D6.2@3104.06,-570 ; K3.4@3209.72,-1280 3209.72,-1343.58 3243.7,-1377.56 3249.8,-1377.56 3257.72,-1385.47 D7.2@3257.72,-1391.57 3302.99,-1391.57 3334.52,-1423.11 3522.62,-1611.2 TVS1.2@3531.42,-1620
  Top Layer w24: U1.7@3199.4,-1709.22 3199.4,-1656.62 3244.82,-1611.2 TVS1.2@3522.62,-1611.2
  Top Layer w25: 3676.3,-970.47 v7(3781.18,-970.47)
  Top Layer w30: K2.4@3096.18,-475 3231.18,-610 3420.71,-610 v7(3781.18,-970.47)
  Top Layer w35: C4.1@3381.85,-1805 3743.84,-1443.01 3743.84,-1197.37 3781.18,-1160.03 v7(3781.18,-970.47) ; L1.2@3870,-1585 4174.23,-1585 4301.16,-1458.08 v12(4360,-1458.08) 4455,-1458.08
  Top Layer w40: C4.1@3381.85,-1805 3384.07,-1802.78 3444.48,-1802.78 3527.04,-1720.22 3527.04,-1624.38 TVS1.2@3531.42,-1620 3547.27,-1604.15 3547.27,-1540.45 3587.71,-1500 3785,-1500 L1.2@3870,-1585
/CS1: 
/RES: 
A0: 
B_1: 
B_2: 
B_3: 
BK_Voltage_Control: 